# EAGLE board RedBot_Line_Sensor_Panel_v11 (EAGLE 6.5.0)
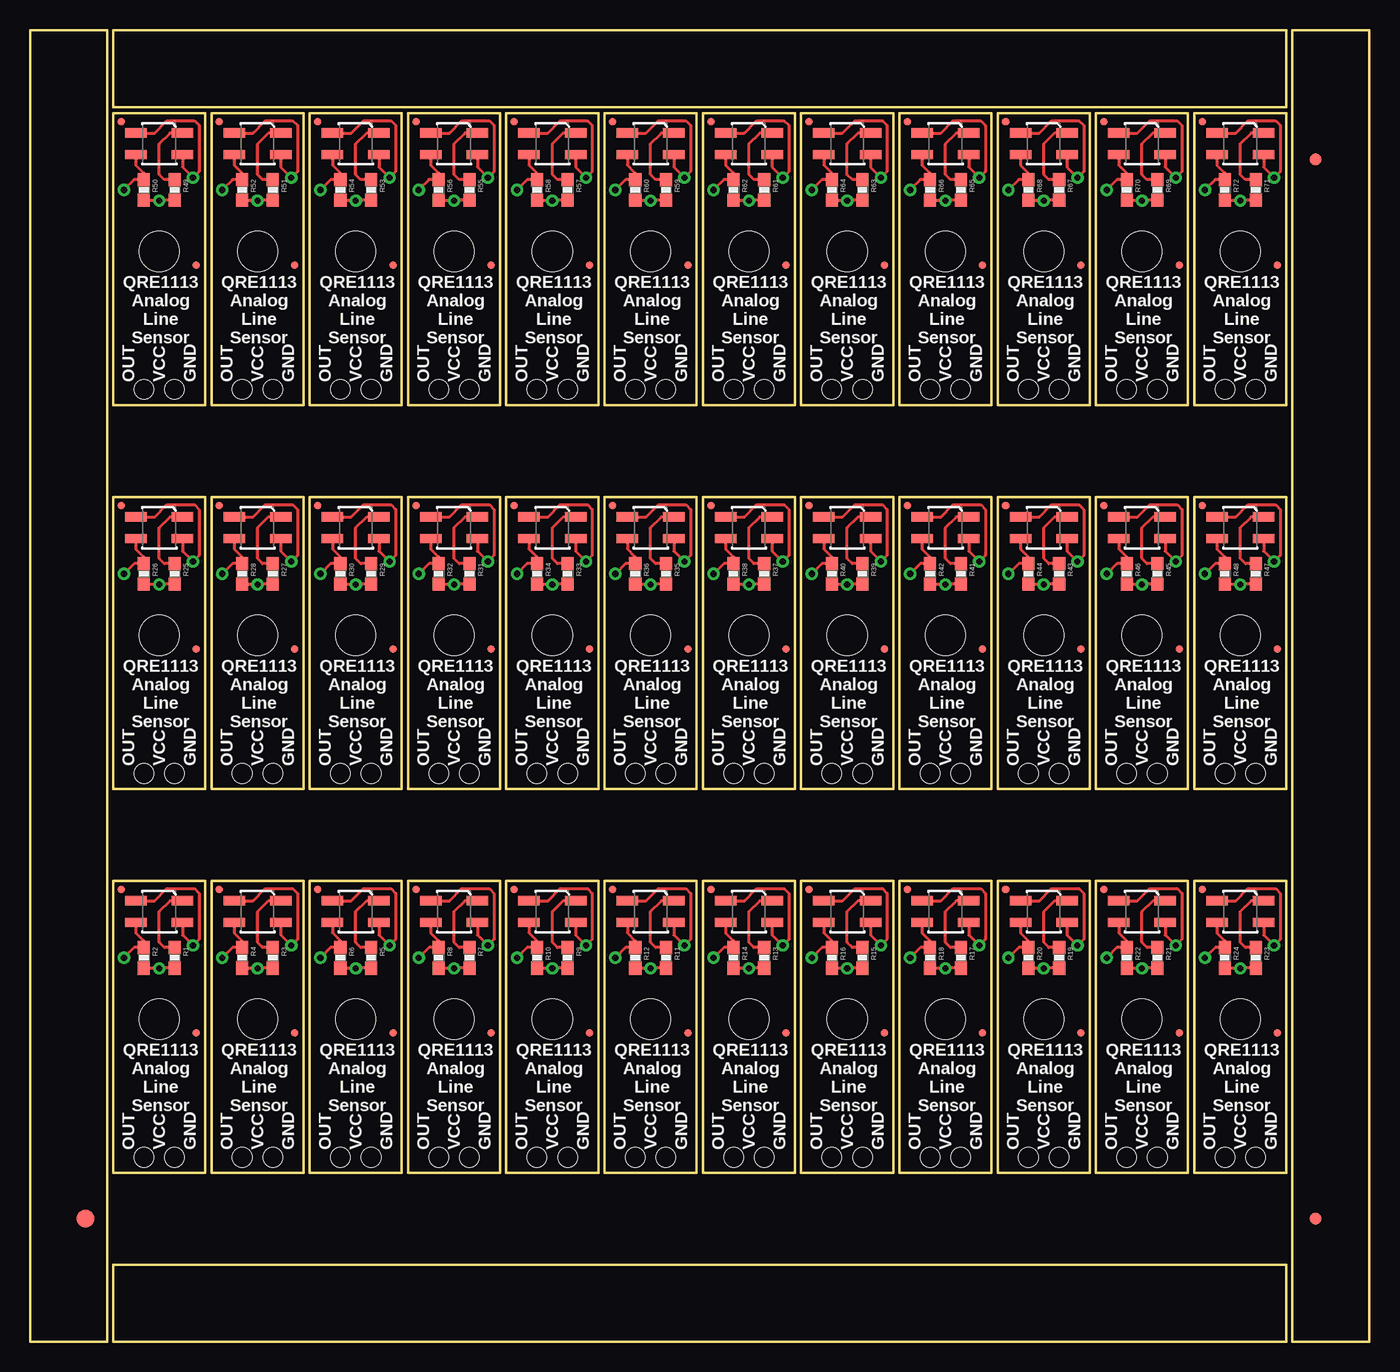
[diagram p0: board, top side]
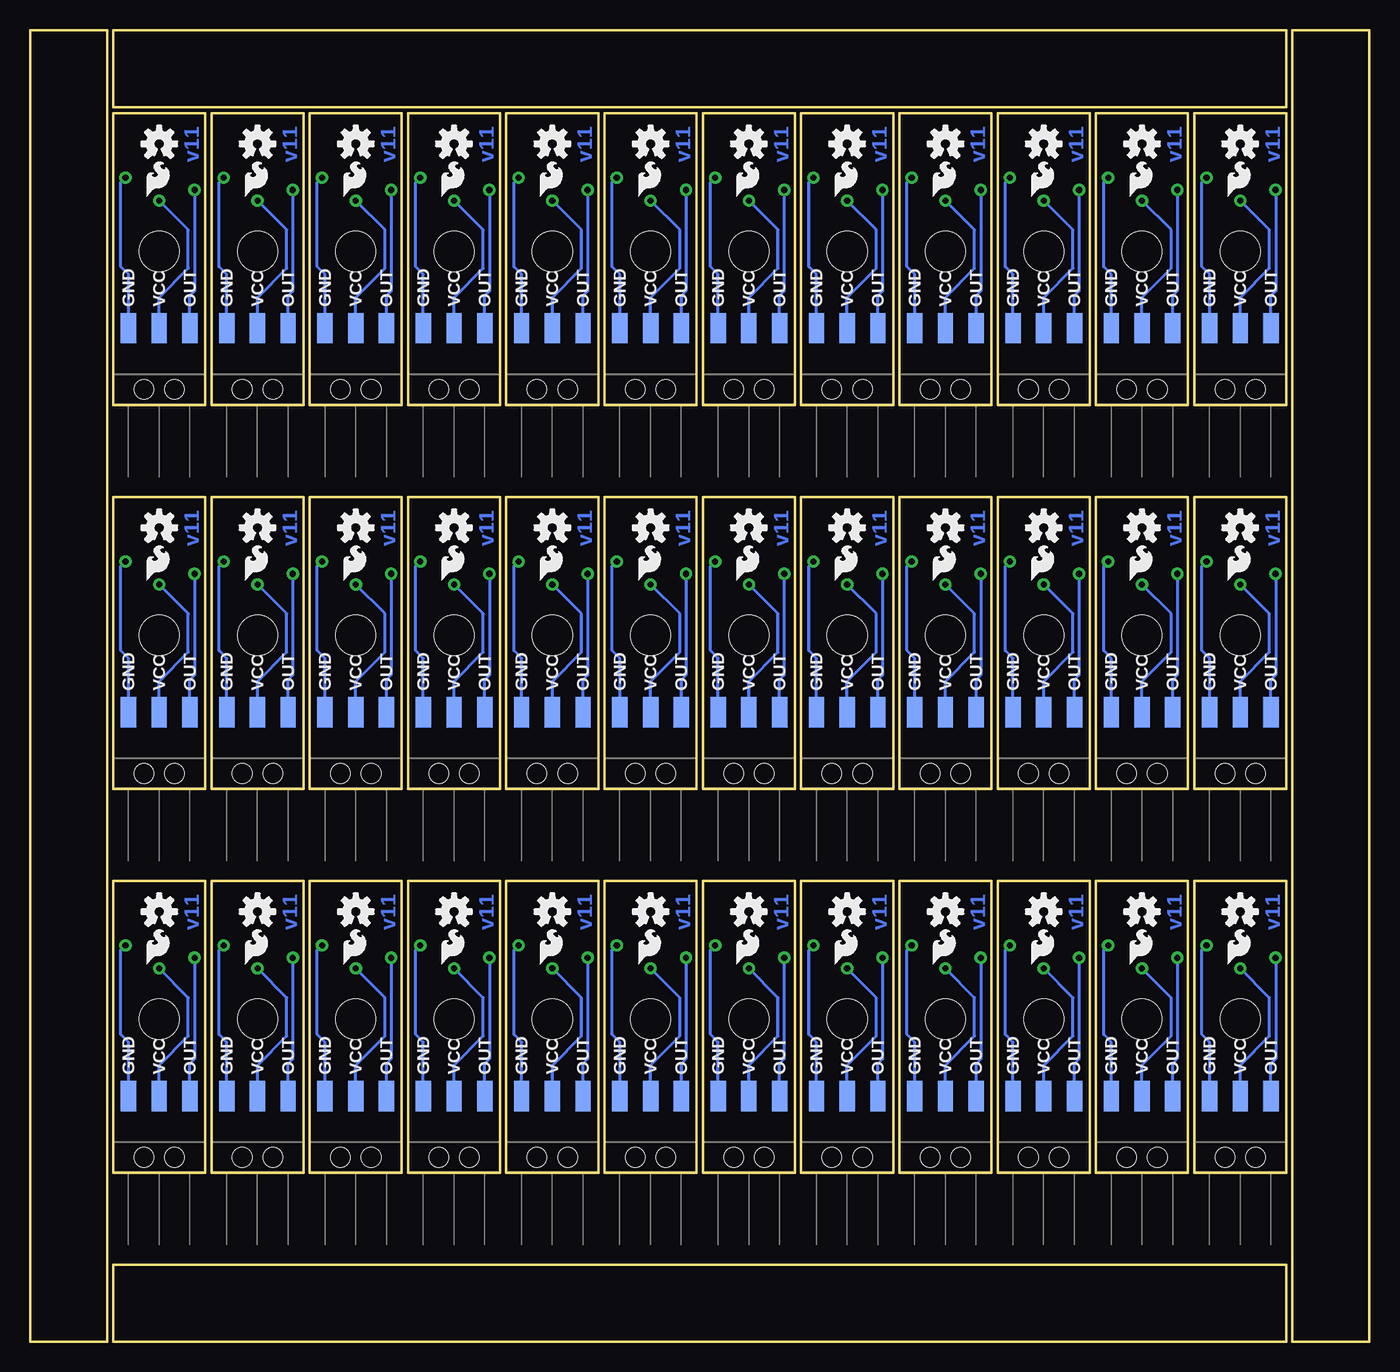
[diagram p1: board, bottom side, seen from below]

Size 110.74 x 108.46 mm. Coordinates in mm from the lower left corner, seen from the top.
Outline: 6.35,86.36 6.35,0 0,0 0,36.83
Outline: 110.74,86.36 110.74,0 104.39,0 104.39,36.83
Outline: 0,29.21 0,108.46 6.35,108.46 6.35,78.74
Outline: 104.39,29.21 104.39,108.46 110.74,108.46 110.74,78.74
Outline: 6.86,13.97 14.48,13.97 14.48,38.1 6.86,38.1 6.86,13.97
Outline: 14.99,13.97 22.61,13.97 22.61,38.1 14.99,38.1 14.99,13.97
Outline: 23.11,13.97 30.73,13.97 30.73,38.1 23.11,38.1 23.11,13.97
Outline: 31.24,13.97 38.86,13.97 38.86,38.1 31.24,38.1 31.24,13.97
Outline: 39.37,13.97 46.99,13.97 46.99,38.1 39.37,38.1 39.37,13.97
Outline: 47.5,13.97 55.12,13.97 55.12,38.1 47.5,38.1 47.5,13.97
Outline: 55.63,13.97 63.25,13.97 63.25,38.1 55.63,38.1 55.63,13.97
Outline: 63.75,13.97 71.37,13.97 71.37,38.1 63.75,38.1 63.75,13.97
Outline: 71.88,13.97 79.5,13.97 79.5,38.1 71.88,38.1 71.88,13.97
Outline: 80.01,13.97 87.63,13.97 87.63,38.1 80.01,38.1 80.01,13.97
Outline: 88.14,13.97 95.76,13.97 95.76,38.1 88.14,38.1 88.14,13.97
Outline: 96.27,13.97 103.89,13.97 103.89,38.1 96.27,38.1 96.27,13.97
Outline: 6.86,45.72 14.48,45.72 14.48,69.85 6.86,69.85 6.86,45.72
Outline: 14.99,45.72 22.61,45.72 22.61,69.85 14.99,69.85 14.99,45.72
Outline: 23.11,45.72 30.73,45.72 30.73,69.85 23.11,69.85 23.11,45.72
Outline: 31.24,45.72 38.86,45.72 38.86,69.85 31.24,69.85 31.24,45.72
Outline: 39.37,45.72 46.99,45.72 46.99,69.85 39.37,69.85 39.37,45.72
Outline: 47.5,45.72 55.12,45.72 55.12,69.85 47.5,69.85 47.5,45.72
Outline: 55.63,45.72 63.25,45.72 63.25,69.85 55.63,69.85 55.63,45.72
Outline: 63.75,45.72 71.37,45.72 71.37,69.85 63.75,69.85 63.75,45.72
Outline: 71.88,45.72 79.5,45.72 79.5,69.85 71.88,69.85 71.88,45.72
Outline: 80.01,45.72 87.63,45.72 87.63,69.85 80.01,69.85 80.01,45.72
Outline: 88.14,45.72 95.76,45.72 95.76,69.85 88.14,69.85 88.14,45.72
Outline: 96.27,45.72 103.89,45.72 103.89,69.85 96.27,69.85 96.27,45.72
Outline: 6.86,77.47 14.48,77.47 14.48,101.6 6.86,101.6 6.86,77.47
Outline: 14.99,77.47 22.61,77.47 22.61,101.6 14.99,101.6 14.99,77.47
Outline: 23.11,77.47 30.73,77.47 30.73,101.6 23.11,101.6 23.11,77.47
Outline: 31.24,77.47 38.86,77.47 38.86,101.6 31.24,101.6 31.24,77.47
Outline: 39.37,77.47 46.99,77.47 46.99,101.6 39.37,101.6 39.37,77.47
Outline: 47.5,77.47 55.12,77.47 55.12,101.6 47.5,101.6 47.5,77.47
Outline: 55.63,77.47 63.25,77.47 63.25,101.6 55.63,101.6 55.63,77.47
Outline: 63.75,77.47 71.37,77.47 71.37,101.6 63.75,101.6 63.75,77.47
Outline: 71.88,77.47 79.5,77.47 79.5,101.6 71.88,101.6 71.88,77.47
Outline: 80.01,77.47 87.63,77.47 87.63,101.6 80.01,101.6 80.01,77.47
Outline: 88.14,77.47 95.76,77.47 95.76,101.6 88.14,101.6 88.14,77.47
Outline: 96.27,77.47 103.89,77.47 103.89,101.6 96.27,101.6 96.27,77.47
Outline: 6.86,102.11 103.89,102.11 103.89,108.46 6.86,108.46 6.86,102.11
Outline: 6.86,0 103.89,0 103.89,6.35 6.86,6.35 6.86,0
Copper layers (1*16): Top 0.035mm / dielectric 1.5mm / Bottom 0.035mm
Design rules "SparkFun-2-layer": minimum track width 7mil, minimum drill 15mil, track to track 8mil, track to pad 8mil, pad to pad 8mil, via to via 8mil, smd to smd 8mil, copper to edge 8mil, drill to drill 8mil, minimum pad ring 12mil, minimum via ring 10mil, stop-mask expansion 4mil, vias tented up to drill 20mil, thermal gap 10mil

## Footprints (pad centres in the part's own frame; a part is rotated, then mirrored left to right if it is on the bottom)
FIDUCIAL-1.5X3 = smd 1.5 x 1.5: 1 0,0
FIDUCIAL-1X2 = smd 1 x 1: 1 0,0
MICRO-FIDUCIAL = smd 0.635 x 0.635: 1 0,0
1X03_SMD_RA_MALE_POST = smd 1.27 x 2.5: 1 -2.54,5.07; 2 0,5.07; 3 2.54,5.07 | hole 1.6: -1.27,0; 1.27,0
0603-RES = smd 1.1 x 1: 1 -0.85,0; 2 0.85,0
STAND-OFF = hole 3.302: 0,0
QRE1113-W = smd 1.778 x 0.762: 1 -1.927,-0.9; 2 1.927,-0.9; 3 1.927,0.9; 4 -1.927,0.9

## Placement (x,y rotation side)
E$1  [FIDUCIAL-1.5X3]  4.57,10.16 0 top
E$2  [FIDUCIAL-1X2]  106.3,10.16 0 top
E$6  [FIDUCIAL-1X2]  106.3,97.79 180 top
FID1  FIDUCIALUFIDUCIAL  [MICRO-FIDUCIAL]  13.74,25.53 0 top
FID2  FIDUCIALUFIDUCIAL  [MICRO-FIDUCIAL]  7.52,37.39 0 top
FID3  FIDUCIALUFIDUCIAL  [MICRO-FIDUCIAL]  21.87,25.53 0 top
FID4  FIDUCIALUFIDUCIAL  [MICRO-FIDUCIAL]  15.65,37.39 0 top
FID5  FIDUCIALUFIDUCIAL  [MICRO-FIDUCIAL]  30,25.53 0 top
FID6  FIDUCIALUFIDUCIAL  [MICRO-FIDUCIAL]  23.77,37.39 0 top
FID7  FIDUCIALUFIDUCIAL  [MICRO-FIDUCIAL]  38.13,25.53 0 top
FID8  FIDUCIALUFIDUCIAL  [MICRO-FIDUCIAL]  31.9,37.39 0 top
FID9  FIDUCIALUFIDUCIAL  [MICRO-FIDUCIAL]  46.25,25.53 0 top
FID10  FIDUCIALUFIDUCIAL  [MICRO-FIDUCIAL]  40.03,37.39 0 top
FID11  FIDUCIALUFIDUCIAL  [MICRO-FIDUCIAL]  54.38,25.53 0 top
FID12  FIDUCIALUFIDUCIAL  [MICRO-FIDUCIAL]  48.16,37.39 0 top
FID13  FIDUCIALUFIDUCIAL  [MICRO-FIDUCIAL]  62.51,25.53 0 top
FID14  FIDUCIALUFIDUCIAL  [MICRO-FIDUCIAL]  56.29,37.39 0 top
FID15  FIDUCIALUFIDUCIAL  [MICRO-FIDUCIAL]  70.64,25.53 0 top
FID16  FIDUCIALUFIDUCIAL  [MICRO-FIDUCIAL]  64.41,37.39 0 top
FID17  FIDUCIALUFIDUCIAL  [MICRO-FIDUCIAL]  78.77,25.53 0 top
FID18  FIDUCIALUFIDUCIAL  [MICRO-FIDUCIAL]  72.54,37.39 0 top
FID19  FIDUCIALUFIDUCIAL  [MICRO-FIDUCIAL]  86.89,25.53 0 top
FID20  FIDUCIALUFIDUCIAL  [MICRO-FIDUCIAL]  80.67,37.39 0 top
FID21  FIDUCIALUFIDUCIAL  [MICRO-FIDUCIAL]  95.02,25.53 0 top
FID22  FIDUCIALUFIDUCIAL  [MICRO-FIDUCIAL]  88.8,37.39 0 top
FID23  FIDUCIALUFIDUCIAL  [MICRO-FIDUCIAL]  103.15,25.53 0 top
FID24  FIDUCIALUFIDUCIAL  [MICRO-FIDUCIAL]  96.93,37.39 0 top
FID25  FIDUCIALUFIDUCIAL  [MICRO-FIDUCIAL]  13.74,57.28 0 top
FID26  FIDUCIALUFIDUCIAL  [MICRO-FIDUCIAL]  7.52,69.14 0 top
FID27  FIDUCIALUFIDUCIAL  [MICRO-FIDUCIAL]  21.87,57.28 0 top
FID28  FIDUCIALUFIDUCIAL  [MICRO-FIDUCIAL]  15.65,69.14 0 top
FID29  FIDUCIALUFIDUCIAL  [MICRO-FIDUCIAL]  30,57.28 0 top
FID30  FIDUCIALUFIDUCIAL  [MICRO-FIDUCIAL]  23.77,69.14 0 top
FID31  FIDUCIALUFIDUCIAL  [MICRO-FIDUCIAL]  38.13,57.28 0 top
FID32  FIDUCIALUFIDUCIAL  [MICRO-FIDUCIAL]  31.9,69.14 0 top
FID33  FIDUCIALUFIDUCIAL  [MICRO-FIDUCIAL]  46.25,57.28 0 top
FID34  FIDUCIALUFIDUCIAL  [MICRO-FIDUCIAL]  40.03,69.14 0 top
FID35  FIDUCIALUFIDUCIAL  [MICRO-FIDUCIAL]  54.38,57.28 0 top
FID36  FIDUCIALUFIDUCIAL  [MICRO-FIDUCIAL]  48.16,69.14 0 top
FID37  FIDUCIALUFIDUCIAL  [MICRO-FIDUCIAL]  62.51,57.28 0 top
FID38  FIDUCIALUFIDUCIAL  [MICRO-FIDUCIAL]  56.29,69.14 0 top
FID39  FIDUCIALUFIDUCIAL  [MICRO-FIDUCIAL]  70.64,57.28 0 top
FID40  FIDUCIALUFIDUCIAL  [MICRO-FIDUCIAL]  64.41,69.14 0 top
FID41  FIDUCIALUFIDUCIAL  [MICRO-FIDUCIAL]  78.77,57.28 0 top
FID42  FIDUCIALUFIDUCIAL  [MICRO-FIDUCIAL]  72.54,69.14 0 top
FID43  FIDUCIALUFIDUCIAL  [MICRO-FIDUCIAL]  86.89,57.28 0 top
FID44  FIDUCIALUFIDUCIAL  [MICRO-FIDUCIAL]  80.67,69.14 0 top
FID45  FIDUCIALUFIDUCIAL  [MICRO-FIDUCIAL]  95.02,57.28 0 top
FID46  FIDUCIALUFIDUCIAL  [MICRO-FIDUCIAL]  88.8,69.14 0 top
FID47  FIDUCIALUFIDUCIAL  [MICRO-FIDUCIAL]  103.15,57.28 0 top
FID48  FIDUCIALUFIDUCIAL  [MICRO-FIDUCIAL]  96.93,69.14 0 top
FID49  FIDUCIALUFIDUCIAL  [MICRO-FIDUCIAL]  13.74,89.03 0 top
FID50  FIDUCIALUFIDUCIAL  [MICRO-FIDUCIAL]  7.52,100.89 0 top
FID51  FIDUCIALUFIDUCIAL  [MICRO-FIDUCIAL]  21.87,89.03 0 top
FID52  FIDUCIALUFIDUCIAL  [MICRO-FIDUCIAL]  15.65,100.89 0 top
FID53  FIDUCIALUFIDUCIAL  [MICRO-FIDUCIAL]  30,89.03 0 top
FID54  FIDUCIALUFIDUCIAL  [MICRO-FIDUCIAL]  23.77,100.89 0 top
FID55  FIDUCIALUFIDUCIAL  [MICRO-FIDUCIAL]  38.13,89.03 0 top
FID56  FIDUCIALUFIDUCIAL  [MICRO-FIDUCIAL]  31.9,100.89 0 top
FID57  FIDUCIALUFIDUCIAL  [MICRO-FIDUCIAL]  46.25,89.03 0 top
FID58  FIDUCIALUFIDUCIAL  [MICRO-FIDUCIAL]  40.03,100.89 0 top
FID59  FIDUCIALUFIDUCIAL  [MICRO-FIDUCIAL]  54.38,89.03 0 top
FID60  FIDUCIALUFIDUCIAL  [MICRO-FIDUCIAL]  48.16,100.89 0 top
FID61  FIDUCIALUFIDUCIAL  [MICRO-FIDUCIAL]  62.51,89.03 0 top
FID62  FIDUCIALUFIDUCIAL  [MICRO-FIDUCIAL]  56.29,100.89 0 top
FID63  FIDUCIALUFIDUCIAL  [MICRO-FIDUCIAL]  70.64,89.03 0 top
FID64  FIDUCIALUFIDUCIAL  [MICRO-FIDUCIAL]  64.41,100.89 0 top
FID65  FIDUCIALUFIDUCIAL  [MICRO-FIDUCIAL]  78.77,89.03 0 top
FID66  FIDUCIALUFIDUCIAL  [MICRO-FIDUCIAL]  72.54,100.89 0 top
FID67  FIDUCIALUFIDUCIAL  [MICRO-FIDUCIAL]  86.89,89.03 0 top
FID68  FIDUCIALUFIDUCIAL  [MICRO-FIDUCIAL]  80.67,100.89 0 top
FID69  FIDUCIALUFIDUCIAL  [MICRO-FIDUCIAL]  95.02,89.03 0 top
FID70  FIDUCIALUFIDUCIAL  [MICRO-FIDUCIAL]  88.8,100.89 0 top
FID71  FIDUCIALUFIDUCIAL  [MICRO-FIDUCIAL]  103.15,89.03 0 top
FID72  FIDUCIALUFIDUCIAL  [MICRO-FIDUCIAL]  96.93,100.89 0 top
JP1  [1X03_SMD_RA_MALE_POST]  10.67,15.24 0 bottom
JP2  [1X03_SMD_RA_MALE_POST]  18.8,15.24 0 bottom
JP3  [1X03_SMD_RA_MALE_POST]  26.92,15.24 0 bottom
JP4  [1X03_SMD_RA_MALE_POST]  35.05,15.24 0 bottom
JP5  [1X03_SMD_RA_MALE_POST]  43.18,15.24 0 bottom
JP6  [1X03_SMD_RA_MALE_POST]  51.31,15.24 0 bottom
JP7  [1X03_SMD_RA_MALE_POST]  59.44,15.24 0 bottom
JP8  [1X03_SMD_RA_MALE_POST]  67.56,15.24 0 bottom
JP9  [1X03_SMD_RA_MALE_POST]  75.69,15.24 0 bottom
JP10  [1X03_SMD_RA_MALE_POST]  83.82,15.24 0 bottom
JP11  [1X03_SMD_RA_MALE_POST]  91.95,15.24 0 bottom
JP12  [1X03_SMD_RA_MALE_POST]  100.08,15.24 0 bottom
JP13  [1X03_SMD_RA_MALE_POST]  10.67,46.99 0 bottom
JP14  [1X03_SMD_RA_MALE_POST]  18.8,46.99 0 bottom
JP15  [1X03_SMD_RA_MALE_POST]  26.92,46.99 0 bottom
JP16  [1X03_SMD_RA_MALE_POST]  35.05,46.99 0 bottom
JP17  [1X03_SMD_RA_MALE_POST]  43.18,46.99 0 bottom
JP18  [1X03_SMD_RA_MALE_POST]  51.31,46.99 0 bottom
JP19  [1X03_SMD_RA_MALE_POST]  59.44,46.99 0 bottom
JP20  [1X03_SMD_RA_MALE_POST]  67.56,46.99 0 bottom
JP21  [1X03_SMD_RA_MALE_POST]  75.69,46.99 0 bottom
JP22  [1X03_SMD_RA_MALE_POST]  83.82,46.99 0 bottom
JP23  [1X03_SMD_RA_MALE_POST]  91.95,46.99 0 bottom
JP24  [1X03_SMD_RA_MALE_POST]  100.08,46.99 0 bottom
JP25  [1X03_SMD_RA_MALE_POST]  10.67,78.74 0 bottom
JP26  [1X03_SMD_RA_MALE_POST]  18.8,78.74 0 bottom
JP27  [1X03_SMD_RA_MALE_POST]  26.92,78.74 0 bottom
JP28  [1X03_SMD_RA_MALE_POST]  35.05,78.74 0 bottom
JP29  [1X03_SMD_RA_MALE_POST]  43.18,78.74 0 bottom
JP30  [1X03_SMD_RA_MALE_POST]  51.31,78.74 0 bottom
JP31  [1X03_SMD_RA_MALE_POST]  59.44,78.74 0 bottom
JP32  [1X03_SMD_RA_MALE_POST]  67.56,78.74 0 bottom
JP33  [1X03_SMD_RA_MALE_POST]  75.69,78.74 0 bottom
JP34  [1X03_SMD_RA_MALE_POST]  83.82,78.74 0 bottom
JP35  [1X03_SMD_RA_MALE_POST]  91.95,78.74 0 bottom
JP36  [1X03_SMD_RA_MALE_POST]  100.08,78.74 0 bottom
LOGO1  OSHW-LOGOS  [OSHW-LOGO-S]  18.8,35.56 0 bottom
LOGO2  OSHW-LOGOS  [OSHW-LOGO-S]  10.67,35.56 0 bottom
LOGO3  LOGO-SFESK  [SFE-LOGO-FLAME]  11.68,31.24 0 bottom
LOGO4  LOGO-SFESK  [SFE-LOGO-FLAME]  19.81,31.24 0 bottom
LOGO5  OSHW-LOGOS  [OSHW-LOGO-S]  26.92,35.56 0 bottom
LOGO6  LOGO-SFESK  [SFE-LOGO-FLAME]  27.94,31.24 0 bottom
LOGO7  OSHW-LOGOS  [OSHW-LOGO-S]  35.05,35.56 0 bottom
LOGO8  LOGO-SFESK  [SFE-LOGO-FLAME]  36.07,31.24 0 bottom
LOGO9  OSHW-LOGOS  [OSHW-LOGO-S]  43.18,35.56 0 bottom
LOGO10  LOGO-SFESK  [SFE-LOGO-FLAME]  44.2,31.24 0 bottom
LOGO11  OSHW-LOGOS  [OSHW-LOGO-S]  51.31,35.56 0 bottom
LOGO12  LOGO-SFESK  [SFE-LOGO-FLAME]  52.32,31.24 0 bottom
LOGO13  OSHW-LOGOS  [OSHW-LOGO-S]  59.44,35.56 0 bottom
LOGO14  LOGO-SFESK  [SFE-LOGO-FLAME]  60.45,31.24 0 bottom
LOGO15  OSHW-LOGOS  [OSHW-LOGO-S]  67.56,35.56 0 bottom
LOGO16  LOGO-SFESK  [SFE-LOGO-FLAME]  68.58,31.24 0 bottom
LOGO17  OSHW-LOGOS  [OSHW-LOGO-S]  75.69,35.56 0 bottom
LOGO18  LOGO-SFESK  [SFE-LOGO-FLAME]  76.71,31.24 0 bottom
LOGO19  OSHW-LOGOS  [OSHW-LOGO-S]  83.82,35.56 0 bottom
LOGO20  LOGO-SFESK  [SFE-LOGO-FLAME]  84.84,31.24 0 bottom
LOGO21  OSHW-LOGOS  [OSHW-LOGO-S]  91.95,35.56 0 bottom
LOGO22  LOGO-SFESK  [SFE-LOGO-FLAME]  92.96,31.24 0 bottom
LOGO23  OSHW-LOGOS  [OSHW-LOGO-S]  100.08,35.56 0 bottom
LOGO24  LOGO-SFESK  [SFE-LOGO-FLAME]  101.09,31.24 0 bottom
LOGO25  OSHW-LOGOS  [OSHW-LOGO-S]  10.67,67.31 0 bottom
LOGO26  LOGO-SFESK  [SFE-LOGO-FLAME]  11.68,62.99 0 bottom
LOGO27  OSHW-LOGOS  [OSHW-LOGO-S]  18.8,67.31 0 bottom
LOGO28  LOGO-SFESK  [SFE-LOGO-FLAME]  19.81,62.99 0 bottom
LOGO29  OSHW-LOGOS  [OSHW-LOGO-S]  26.92,67.31 0 bottom
LOGO30  LOGO-SFESK  [SFE-LOGO-FLAME]  27.94,62.99 0 bottom
LOGO31  OSHW-LOGOS  [OSHW-LOGO-S]  35.05,67.31 0 bottom
LOGO32  LOGO-SFESK  [SFE-LOGO-FLAME]  36.07,62.99 0 bottom
LOGO33  OSHW-LOGOS  [OSHW-LOGO-S]  43.18,67.31 0 bottom
LOGO34  LOGO-SFESK  [SFE-LOGO-FLAME]  44.2,62.99 0 bottom
LOGO35  OSHW-LOGOS  [OSHW-LOGO-S]  51.31,67.31 0 bottom
LOGO36  LOGO-SFESK  [SFE-LOGO-FLAME]  52.32,62.99 0 bottom
LOGO37  OSHW-LOGOS  [OSHW-LOGO-S]  59.44,67.31 0 bottom
LOGO38  LOGO-SFESK  [SFE-LOGO-FLAME]  60.45,62.99 0 bottom
LOGO39  OSHW-LOGOS  [OSHW-LOGO-S]  67.56,67.31 0 bottom
LOGO40  LOGO-SFESK  [SFE-LOGO-FLAME]  68.58,62.99 0 bottom
LOGO41  OSHW-LOGOS  [OSHW-LOGO-S]  75.69,67.31 0 bottom
LOGO42  LOGO-SFESK  [SFE-LOGO-FLAME]  76.71,62.99 0 bottom
LOGO43  OSHW-LOGOS  [OSHW-LOGO-S]  83.82,67.31 0 bottom
LOGO44  LOGO-SFESK  [SFE-LOGO-FLAME]  84.84,62.99 0 bottom
LOGO45  OSHW-LOGOS  [OSHW-LOGO-S]  91.95,67.31 0 bottom
LOGO46  LOGO-SFESK  [SFE-LOGO-FLAME]  92.96,62.99 0 bottom
LOGO47  OSHW-LOGOS  [OSHW-LOGO-S]  100.08,67.31 0 bottom
LOGO48  LOGO-SFESK  [SFE-LOGO-FLAME]  101.09,62.99 0 bottom
LOGO49  OSHW-LOGOS  [OSHW-LOGO-S]  10.67,99.06 0 bottom
LOGO50  LOGO-SFESK  [SFE-LOGO-FLAME]  11.68,94.74 0 bottom
LOGO51  OSHW-LOGOS  [OSHW-LOGO-S]  18.8,99.06 0 bottom
LOGO52  LOGO-SFESK  [SFE-LOGO-FLAME]  19.81,94.74 0 bottom
LOGO53  OSHW-LOGOS  [OSHW-LOGO-S]  26.92,99.06 0 bottom
LOGO54  LOGO-SFESK  [SFE-LOGO-FLAME]  27.94,94.74 0 bottom
LOGO55  OSHW-LOGOS  [OSHW-LOGO-S]  35.05,99.06 0 bottom
LOGO56  LOGO-SFESK  [SFE-LOGO-FLAME]  36.07,94.74 0 bottom
LOGO57  OSHW-LOGOS  [OSHW-LOGO-S]  43.18,99.06 0 bottom
LOGO58  LOGO-SFESK  [SFE-LOGO-FLAME]  44.2,94.74 0 bottom
LOGO59  OSHW-LOGOS  [OSHW-LOGO-S]  51.31,99.06 0 bottom
LOGO60  LOGO-SFESK  [SFE-LOGO-FLAME]  52.32,94.74 0 bottom
LOGO61  OSHW-LOGOS  [OSHW-LOGO-S]  59.44,99.06 0 bottom
LOGO62  LOGO-SFESK  [SFE-LOGO-FLAME]  60.45,94.74 0 bottom
LOGO63  OSHW-LOGOS  [OSHW-LOGO-S]  67.56,99.06 0 bottom
LOGO64  LOGO-SFESK  [SFE-LOGO-FLAME]  68.58,94.74 0 bottom
LOGO65  OSHW-LOGOS  [OSHW-LOGO-S]  75.69,99.06 0 bottom
LOGO66  LOGO-SFESK  [SFE-LOGO-FLAME]  76.71,94.74 0 bottom
LOGO67  OSHW-LOGOS  [OSHW-LOGO-S]  83.82,99.06 0 bottom
LOGO68  LOGO-SFESK  [SFE-LOGO-FLAME]  84.84,94.74 0 bottom
LOGO69  OSHW-LOGOS  [OSHW-LOGO-S]  91.95,99.06 0 bottom
LOGO70  LOGO-SFESK  [SFE-LOGO-FLAME]  92.96,94.74 0 bottom
LOGO71  OSHW-LOGOS  [OSHW-LOGO-S]  100.08,99.06 0 bottom
LOGO72  LOGO-SFESK  [SFE-LOGO-FLAME]  101.09,94.74 0 bottom
R1  100  [0603-RES]  11.94,31.75 270 top
R2  10k  [0603-RES]  9.4,31.75 270 top
R3  100  [0603-RES]  20.07,31.75 270 top
R4  10k  [0603-RES]  17.53,31.75 270 top
R5  100  [0603-RES]  28.19,31.75 270 top
R6  10k  [0603-RES]  25.65,31.75 270 top
R7  100  [0603-RES]  36.32,31.75 270 top
R8  10k  [0603-RES]  33.78,31.75 270 top
R9  100  [0603-RES]  44.45,31.75 270 top
R10  10k  [0603-RES]  41.91,31.75 270 top
R11  100  [0603-RES]  52.58,31.75 270 top
R12  10k  [0603-RES]  50.04,31.75 270 top
R13  100  [0603-RES]  60.71,31.75 270 top
R14  10k  [0603-RES]  58.17,31.75 270 top
R15  100  [0603-RES]  68.83,31.75 270 top
R16  10k  [0603-RES]  66.29,31.75 270 top
R17  100  [0603-RES]  76.96,31.75 270 top
R18  10k  [0603-RES]  74.42,31.75 270 top
R19  100  [0603-RES]  85.09,31.75 270 top
R20  10k  [0603-RES]  82.55,31.75 270 top
R21  100  [0603-RES]  93.22,31.75 270 top
R22  10k  [0603-RES]  90.68,31.75 270 top
R23  100  [0603-RES]  101.35,31.75 270 top
R24  10k  [0603-RES]  98.81,31.75 270 top
R25  100  [0603-RES]  11.94,63.5 270 top
R26  10k  [0603-RES]  9.4,63.5 270 top
R27  100  [0603-RES]  20.07,63.5 270 top
R28  10k  [0603-RES]  17.53,63.5 270 top
R29  100  [0603-RES]  28.19,63.5 270 top
R30  10k  [0603-RES]  25.65,63.5 270 top
R31  100  [0603-RES]  36.32,63.5 270 top
R32  10k  [0603-RES]  33.78,63.5 270 top
R33  100  [0603-RES]  44.45,63.5 270 top
R34  10k  [0603-RES]  41.91,63.5 270 top
R35  100  [0603-RES]  52.58,63.5 270 top
R36  10k  [0603-RES]  50.04,63.5 270 top
R37  100  [0603-RES]  60.71,63.5 270 top
R38  10k  [0603-RES]  58.17,63.5 270 top
R39  100  [0603-RES]  68.83,63.5 270 top
R40  10k  [0603-RES]  66.29,63.5 270 top
R41  100  [0603-RES]  76.96,63.5 270 top
R42  10k  [0603-RES]  74.42,63.5 270 top
R43  100  [0603-RES]  85.09,63.5 270 top
R44  10k  [0603-RES]  82.55,63.5 270 top
R45  100  [0603-RES]  93.22,63.5 270 top
R46  10k  [0603-RES]  90.68,63.5 270 top
R47  100  [0603-RES]  101.35,63.5 270 top
R48  10k  [0603-RES]  98.81,63.5 270 top
R49  100  [0603-RES]  11.94,95.25 270 top
R50  10k  [0603-RES]  9.4,95.25 270 top
R51  100  [0603-RES]  20.07,95.25 270 top
R52  10k  [0603-RES]  17.53,95.25 270 top
R53  100  [0603-RES]  28.19,95.25 270 top
R54  10k  [0603-RES]  25.65,95.25 270 top
R55  100  [0603-RES]  36.32,95.25 270 top
R56  10k  [0603-RES]  33.78,95.25 270 top
R57  100  [0603-RES]  44.45,95.25 270 top
R58  10k  [0603-RES]  41.91,95.25 270 top
R59  100  [0603-RES]  52.58,95.25 270 top
R60  10k  [0603-RES]  50.04,95.25 270 top
R61  100  [0603-RES]  60.71,95.25 270 top
R62  10k  [0603-RES]  58.17,95.25 270 top
R63  100  [0603-RES]  68.83,95.25 270 top
R64  10k  [0603-RES]  66.29,95.25 270 top
R65  100  [0603-RES]  76.96,95.25 270 top
R66  10k  [0603-RES]  74.42,95.25 270 top
R67  100  [0603-RES]  85.09,95.25 270 top
R68  10k  [0603-RES]  82.55,95.25 270 top
R69  100  [0603-RES]  93.22,95.25 270 top
R70  10k  [0603-RES]  90.68,95.25 270 top
R71  100  [0603-RES]  101.35,95.25 270 top
R72  10k  [0603-RES]  98.81,95.25 270 top
STANDOFF1  STAND-OFF  [STAND-OFF]  10.67,26.67 0 top
STANDOFF2  STAND-OFF  [STAND-OFF]  18.8,26.67 0 top
STANDOFF3  STAND-OFF  [STAND-OFF]  26.92,26.67 0 top
STANDOFF4  STAND-OFF  [STAND-OFF]  35.05,26.67 0 top
STANDOFF5  STAND-OFF  [STAND-OFF]  43.18,26.67 0 top
STANDOFF6  STAND-OFF  [STAND-OFF]  51.31,26.67 0 top
STANDOFF7  STAND-OFF  [STAND-OFF]  59.44,26.67 0 top
STANDOFF8  STAND-OFF  [STAND-OFF]  67.56,26.67 0 top
STANDOFF9  STAND-OFF  [STAND-OFF]  75.69,26.67 0 top
STANDOFF10  STAND-OFF  [STAND-OFF]  83.82,26.67 0 top
STANDOFF11  STAND-OFF  [STAND-OFF]  91.95,26.67 0 top
STANDOFF12  STAND-OFF  [STAND-OFF]  100.08,26.67 0 top
STANDOFF13  STAND-OFF  [STAND-OFF]  10.67,58.42 0 top
STANDOFF14  STAND-OFF  [STAND-OFF]  18.8,58.42 0 top
STANDOFF15  STAND-OFF  [STAND-OFF]  26.92,58.42 0 top
STANDOFF16  STAND-OFF  [STAND-OFF]  35.05,58.42 0 top
STANDOFF17  STAND-OFF  [STAND-OFF]  43.18,58.42 0 top
STANDOFF18  STAND-OFF  [STAND-OFF]  51.31,58.42 0 top
STANDOFF19  STAND-OFF  [STAND-OFF]  59.44,58.42 0 top
STANDOFF20  STAND-OFF  [STAND-OFF]  67.56,58.42 0 top
STANDOFF21  STAND-OFF  [STAND-OFF]  75.69,58.42 0 top
STANDOFF22  STAND-OFF  [STAND-OFF]  83.82,58.42 0 top
STANDOFF23  STAND-OFF  [STAND-OFF]  91.95,58.42 0 top
STANDOFF24  STAND-OFF  [STAND-OFF]  100.08,58.42 0 top
STANDOFF25  STAND-OFF  [STAND-OFF]  10.67,90.17 0 top
STANDOFF26  STAND-OFF  [STAND-OFF]  18.8,90.17 0 top
STANDOFF27  STAND-OFF  [STAND-OFF]  26.92,90.17 0 top
STANDOFF28  STAND-OFF  [STAND-OFF]  35.05,90.17 0 top
STANDOFF29  STAND-OFF  [STAND-OFF]  43.18,90.17 0 top
STANDOFF30  STAND-OFF  [STAND-OFF]  51.31,90.17 0 top
STANDOFF31  STAND-OFF  [STAND-OFF]  59.44,90.17 0 top
STANDOFF32  STAND-OFF  [STAND-OFF]  67.56,90.17 0 top
STANDOFF33  STAND-OFF  [STAND-OFF]  75.69,90.17 0 top
STANDOFF34  STAND-OFF  [STAND-OFF]  83.82,90.17 0 top
STANDOFF35  STAND-OFF  [STAND-OFF]  91.95,90.17 0 top
STANDOFF36  STAND-OFF  [STAND-OFF]  100.08,90.17 0 top
U1  QRE1113SMD-W  [QRE1113-W]  10.67,35.56 180 top
U2  QRE1113SMD-W  [QRE1113-W]  18.8,35.56 180 top
U3  QRE1113SMD-W  [QRE1113-W]  26.92,35.56 180 top
U4  QRE1113SMD-W  [QRE1113-W]  35.05,35.56 180 top
U5  QRE1113SMD-W  [QRE1113-W]  43.18,35.56 180 top
U6  QRE1113SMD-W  [QRE1113-W]  51.31,35.56 180 top
U7  QRE1113SMD-W  [QRE1113-W]  59.44,35.56 180 top
U8  QRE1113SMD-W  [QRE1113-W]  67.56,35.56 180 top
U9  QRE1113SMD-W  [QRE1113-W]  75.69,35.56 180 top
U10  QRE1113SMD-W  [QRE1113-W]  83.82,35.56 180 top
U11  QRE1113SMD-W  [QRE1113-W]  91.95,35.56 180 top
U12  QRE1113SMD-W  [QRE1113-W]  100.08,35.56 180 top
U13  QRE1113SMD-W  [QRE1113-W]  10.67,67.31 180 top
U14  QRE1113SMD-W  [QRE1113-W]  18.8,67.31 180 top
U15  QRE1113SMD-W  [QRE1113-W]  26.92,67.31 180 top
U16  QRE1113SMD-W  [QRE1113-W]  35.05,67.31 180 top
U17  QRE1113SMD-W  [QRE1113-W]  43.18,67.31 180 top
U18  QRE1113SMD-W  [QRE1113-W]  51.31,67.31 180 top
U19  QRE1113SMD-W  [QRE1113-W]  59.44,67.31 180 top
U20  QRE1113SMD-W  [QRE1113-W]  67.56,67.31 180 top
U21  QRE1113SMD-W  [QRE1113-W]  75.69,67.31 180 top
U22  QRE1113SMD-W  [QRE1113-W]  83.82,67.31 180 top
U23  QRE1113SMD-W  [QRE1113-W]  91.95,67.31 180 top
U24  QRE1113SMD-W  [QRE1113-W]  100.08,67.31 180 top
U25  QRE1113SMD-W  [QRE1113-W]  10.67,99.06 180 top
U26  QRE1113SMD-W  [QRE1113-W]  18.8,99.06 180 top
U27  QRE1113SMD-W  [QRE1113-W]  26.92,99.06 180 top
U28  QRE1113SMD-W  [QRE1113-W]  35.05,99.06 180 top
U29  QRE1113SMD-W  [QRE1113-W]  43.18,99.06 180 top
U30  QRE1113SMD-W  [QRE1113-W]  51.31,99.06 180 top
U31  QRE1113SMD-W  [QRE1113-W]  59.44,99.06 180 top
U32  QRE1113SMD-W  [QRE1113-W]  67.56,99.06 180 top
U33  QRE1113SMD-W  [QRE1113-W]  75.69,99.06 180 top
U34  QRE1113SMD-W  [QRE1113-W]  83.82,99.06 180 top
U35  QRE1113SMD-W  [QRE1113-W]  91.95,99.06 180 top
U36  QRE1113SMD-W  [QRE1113-W]  100.08,99.06 180 top

## Library data of the parts
E$1 E$2 E$6 FID1-FID72 LOGO1-LOGO72 = SparkFun-Aesthetics
JP1-JP36 = SparkFun-Connectors
R1 R3 R5 R7 R9 R11 R13 R15 R17 R19 R21 R23 R25 R27 R29 R31 R33 R35 R37 R39 R41 R43 R45 R47 R49 R51 R53 R55 R57 R59 R61 R63 R65 R67 R69 R71 = SparkFun-Resistors; PROD_ID: RES-07863
R2 R4 R6 R8 R10 R12 R14 R16 R18 R20 R22 R24 R26 R28 R30 R32 R34 R36 R38 R40 R42 R44 R46 R48 R50 R52 R54 R56 R58 R60 R62 R64 R66 R68 R70 R72 = SparkFun-Resistors; PROD_ID: RES-00824
STANDOFF1-STANDOFF36 = SparkFun-Electromechanical
U1-U36 = SparkFun-Sensors

## Nets
5V: JP1.2 R1.2 R2.2
5V1: JP2.2 R3.2 R4.2
5V2: JP3.2 R5.2 R6.2
5V3: JP4.2 R7.2 R8.2
5V4: JP5.2 R9.2 R10.2
5V5: JP6.2 R11.2 R12.2
5V6: JP7.2 R13.2 R14.2
5V7: JP8.2 R15.2 R16.2
5V8: JP9.2 R17.2 R18.2
5V9: JP10.2 R19.2 R20.2
5V10: JP11.2 R21.2 R22.2
5V11: JP12.2 R23.2 R24.2
5V12: JP13.2 R25.2 R26.2
5V13: JP14.2 R27.2 R28.2
5V14: JP15.2 R29.2 R30.2
5V15: JP16.2 R31.2 R32.2
5V16: JP17.2 R33.2 R34.2
5V17: JP18.2 R35.2 R36.2
5V18: JP19.2 R37.2 R38.2
5V19: JP20.2 R39.2 R40.2
5V20: JP21.2 R41.2 R42.2
5V21: JP22.2 R43.2 R44.2
5V22: JP23.2 R45.2 R46.2
5V23: JP24.2 R47.2 R48.2
5V24: JP25.2 R49.2 R50.2
5V25: JP26.2 R51.2 R52.2
5V26: JP27.2 R53.2 R54.2
5V27: JP28.2 R55.2 R56.2
5V28: JP29.2 R57.2 R58.2
5V29: JP30.2 R59.2 R60.2
5V30: JP31.2 R61.2 R62.2
5V31: JP32.2 R63.2 R64.2
5V32: JP33.2 R65.2 R66.2
5V33: JP34.2 R67.2 R68.2
5V34: JP35.2 R69.2 R70.2
5V35: JP36.2 R71.2 R72.2
GND: JP1.1 U1.2 U1.4
GND1: JP2.1 U2.2 U2.4
GND2: JP3.1 U3.2 U3.4
GND3: JP4.1 U4.2 U4.4
GND4: JP5.1 U5.2 U5.4
GND5: JP6.1 U6.2 U6.4
GND6: JP7.1 U7.2 U7.4
GND7: JP8.1 U8.2 U8.4
GND8: JP9.1 U9.2 U9.4
GND9: JP10.1 U10.2 U10.4
GND10: JP11.1 U11.2 U11.4
GND11: JP12.1 U12.2 U12.4
GND12: JP13.1 U13.2 U13.4
GND13: JP14.1 U14.2 U14.4
GND14: JP15.1 U15.2 U15.4
GND15: JP16.1 U16.2 U16.4
GND16: JP17.1 U17.2 U17.4
GND17: JP18.1 U18.2 U18.4
GND18: JP19.1 U19.2 U19.4
GND19: JP20.1 U20.2 U20.4
GND20: JP21.1 U21.2 U21.4
GND21: JP22.1 U22.2 U22.4
GND22: JP23.1 U23.2 U23.4
GND23: JP24.1 U24.2 U24.4
GND24: JP25.1 U25.2 U25.4
GND25: JP26.1 U26.2 U26.4
GND26: JP27.1 U27.2 U27.4
GND27: JP28.1 U28.2 U28.4
GND28: JP29.1 U29.2 U29.4
GND29: JP30.1 U30.2 U30.4
GND30: JP31.1 U31.2 U31.4
GND31: JP32.1 U32.2 U32.4
GND32: JP33.1 U33.2 U33.4
GND33: JP34.1 U34.2 U34.4
GND34: JP35.1 U35.2 U35.4
GND35: JP36.1 U36.2 U36.4
N$1: R1.1 U1.1
N$2: JP1.3 R2.1 U1.3
N$3: R3.1 U2.1
N$4: JP2.3 R4.1 U2.3
N$5: R5.1 U3.1
N$6: JP3.3 R6.1 U3.3
N$7: R7.1 U4.1
N$8: JP4.3 R8.1 U4.3
N$9: R9.1 U5.1
N$10: JP5.3 R10.1 U5.3
N$11: R11.1 U6.1
N$12: JP6.3 R12.1 U6.3
N$13: R13.1 U7.1
N$14: JP7.3 R14.1 U7.3
N$15: R15.1 U8.1
N$16: JP8.3 R16.1 U8.3
N$17: R17.1 U9.1
N$18: JP9.3 R18.1 U9.3
N$19: R19.1 U10.1
N$20: JP10.3 R20.1 U10.3
N$21: R21.1 U11.1
N$22: JP11.3 R22.1 U11.3
N$23: R23.1 U12.1
N$24: JP12.3 R24.1 U12.3
N$25: R25.1 U13.1
N$26: JP13.3 R26.1 U13.3
N$27: R27.1 U14.1
N$28: JP14.3 R28.1 U14.3
N$29: R29.1 U15.1
N$30: JP15.3 R30.1 U15.3
N$31: R31.1 U16.1
N$32: JP16.3 R32.1 U16.3
N$33: R33.1 U17.1
N$34: JP17.3 R34.1 U17.3
N$35: R35.1 U18.1
N$36: JP18.3 R36.1 U18.3
N$37: R37.1 U19.1
N$38: JP19.3 R38.1 U19.3
N$39: R39.1 U20.1
N$40: JP20.3 R40.1 U20.3
N$41: R41.1 U21.1
N$42: JP21.3 R42.1 U21.3
N$43: R43.1 U22.1
N$44: JP22.3 R44.1 U22.3
N$45: R45.1 U23.1
N$46: JP23.3 R46.1 U23.3
N$47: R47.1 U24.1
N$48: JP24.3 R48.1 U24.3
N$49: R49.1 U25.1
N$50: JP25.3 R50.1 U25.3
N$51: R51.1 U26.1
N$52: JP26.3 R52.1 U26.3
N$53: R53.1 U27.1
N$54: JP27.3 R54.1 U27.3
N$55: R55.1 U28.1
N$56: JP28.3 R56.1 U28.3
N$57: R57.1 U29.1
N$58: JP29.3 R58.1 U29.3
N$59: R59.1 U30.1
N$60: JP30.3 R60.1 U30.3
N$61: R61.1 U31.1
N$62: JP31.3 R62.1 U31.3
N$63: R63.1 U32.1
N$64: JP32.3 R64.1 U32.3
N$65: R65.1 U33.1
N$66: JP33.3 R66.1 U33.3
N$67: R67.1 U34.1
N$68: JP34.3 R68.1 U34.3
N$69: R69.1 U35.1
N$70: JP35.3 R70.1 U35.3
N$71: R71.1 U36.1
N$72: JP36.3 R72.1 U36.3

## Tracks (layer width: path | path; a pad name or v marks a point on that pad's centre or on a via)
5V  (via drill 0.51)
  Top 0.254: R2.2 10.63,30.9 v10.67,30.86 10.71,30.9 R1.2
  Bottom 0.254: JP1.2 10.67,22.86 8.26,25.27 8.26,28.45 v10.67,30.86
5V1  (via drill 0.51)
  Top 0.254: R4.2 18.76,30.9 v18.8,30.86 18.84,30.9 R3.2
  Bottom 0.254: JP2.2 18.8,22.86 16.38,25.27 16.38,28.45 v18.8,30.86
5V2  (via drill 0.51)
  Top 0.254: R6.2 26.89,30.9 v26.92,30.86 26.96,30.9 R5.2
  Bottom 0.254: JP3.2 26.92,22.86 24.51,25.27 24.51,28.45 v26.92,30.86
5V3  (via drill 0.51)
  Top 0.254: R8.2 35.01,30.9 v35.05,30.86 35.09,30.9 R7.2
  Bottom 0.254: JP4.2 35.05,22.86 32.64,25.27 32.64,28.45 v35.05,30.86
5V4  (via drill 0.51)
  Top 0.254: R10.2 43.14,30.9 v43.18,30.86 43.22,30.9 R9.2
  Bottom 0.254: JP5.2 43.18,22.86 40.77,25.27 40.77,28.45 v43.18,30.86
5V5  (via drill 0.51)
  Top 0.254: R12.2 51.27,30.9 v51.31,30.86 51.35,30.9 R11.2
  Bottom 0.254: JP6.2 51.31,22.86 48.9,25.27 48.9,28.45 v51.31,30.86
5V6  (via drill 0.51)
  Top 0.254: R14.2 59.4,30.9 v59.44,30.86 59.48,30.9 R13.2
  Bottom 0.254: JP7.2 59.44,22.86 57.02,25.27 57.02,28.45 v59.44,30.86
5V7  (via drill 0.51)
  Top 0.254: R16.2 67.53,30.9 v67.56,30.86 67.6,30.9 R15.2
  Bottom 0.254: JP8.2 67.56,22.86 65.15,25.27 65.15,28.45 v67.56,30.86
5V8  (via drill 0.51)
  Top 0.254: R18.2 75.65,30.9 v75.69,30.86 75.73,30.9 R17.2
  Bottom 0.254: JP9.2 75.69,22.86 73.28,25.27 73.28,28.45 v75.69,30.86
5V9  (via drill 0.51)
  Top 0.254: R20.2 83.78,30.9 v83.82,30.86 83.86,30.9 R19.2
  Bottom 0.254: JP10.2 83.82,22.86 81.41,25.27 81.41,28.45 v83.82,30.86
5V10  (via drill 0.51)
  Top 0.254: R22.2 91.91,30.9 v91.95,30.86 91.99,30.9 R21.2
  Bottom 0.254: JP11.2 91.95,22.86 89.53,25.27 89.53,28.45 v91.95,30.86
5V11  (via drill 0.51)
  Top 0.254: R24.2 100.04,30.9 v100.08,30.86 100.11,30.9 R23.2
  Bottom 0.254: JP12.2 100.08,22.86 97.66,25.27 97.66,28.45 v100.08,30.86
5V12  (via drill 0.51)
  Top 0.254: R26.2 10.63,62.65 v10.67,62.61 10.71,62.65 R25.2
  Bottom 0.254: JP13.2 10.67,54.61 8.26,57.02 8.26,60.2 v10.67,62.61
5V13  (via drill 0.51)
  Top 0.254: R28.2 18.76,62.65 v18.8,62.61 18.84,62.65 R27.2
  Bottom 0.254: JP14.2 18.8,54.61 16.38,57.02 16.38,60.2 v18.8,62.61
5V14  (via drill 0.51)
  Top 0.254: R30.2 26.89,62.65 v26.92,62.61 26.96,62.65 R29.2
  Bottom 0.254: JP15.2 26.92,54.61 24.51,57.02 24.51,60.2 v26.92,62.61
5V15  (via drill 0.51)
  Top 0.254: R32.2 35.01,62.65 v35.05,62.61 35.09,62.65 R31.2
  Bottom 0.254: JP16.2 35.05,54.61 32.64,57.02 32.64,60.2 v35.05,62.61
5V16  (via drill 0.51)
  Top 0.254: R34.2 43.14,62.65 v43.18,62.61 43.22,62.65 R33.2
  Bottom 0.254: JP17.2 43.18,54.61 40.77,57.02 40.77,60.2 v43.18,62.61
5V17  (via drill 0.51)
  Top 0.254: R36.2 51.27,62.65 v51.31,62.61 51.35,62.65 R35.2
  Bottom 0.254: JP18.2 51.31,54.61 48.9,57.02 48.9,60.2 v51.31,62.61
5V18  (via drill 0.51)
  Top 0.254: R38.2 59.4,62.65 v59.44,62.61 59.48,62.65 R37.2
  Bottom 0.254: JP19.2 59.44,54.61 57.02,57.02 57.02,60.2 v59.44,62.61
5V19  (via drill 0.51)
  Top 0.254: R40.2 67.53,62.65 v67.56,62.61 67.6,62.65 R39.2
  Bottom 0.254: JP20.2 67.56,54.61 65.15,57.02 65.15,60.2 v67.56,62.61
5V20  (via drill 0.51)
  Top 0.254: R42.2 75.65,62.65 v75.69,62.61 75.73,62.65 R41.2
  Bottom 0.254: JP21.2 75.69,54.61 73.28,57.02 73.28,60.2 v75.69,62.61
5V21  (via drill 0.51)
  Top 0.254: R44.2 83.78,62.65 v83.82,62.61 83.86,62.65 R43.2
  Bottom 0.254: JP22.2 83.82,54.61 81.41,57.02 81.41,60.2 v83.82,62.61
5V22  (via drill 0.51)
  Top 0.254: R46.2 91.91,62.65 v91.95,62.61 91.99,62.65 R45.2
  Bottom 0.254: JP23.2 91.95,54.61 89.53,57.02 89.53,60.2 v91.95,62.61
5V23  (via drill 0.51)
  Top 0.254: R48.2 100.04,62.65 v100.08,62.61 100.11,62.65 R47.2
  Bottom 0.254: JP24.2 100.08,54.61 97.66,57.02 97.66,60.2 v100.08,62.61
5V24  (via drill 0.51)
  Top 0.254: R50.2 10.63,94.4 v10.67,94.36 10.71,94.4 R49.2
  Bottom 0.254: JP25.2 10.67,86.36 8.26,88.77 8.26,91.95 v10.67,94.36
5V25  (via drill 0.51)
  Top 0.254: R52.2 18.76,94.4 v18.8,94.36 18.84,94.4 R51.2
  Bottom 0.254: JP26.2 18.8,86.36 16.38,88.77 16.38,91.95 v18.8,94.36
5V26  (via drill 0.51)
  Top 0.254: R54.2 26.89,94.4 v26.92,94.36 26.96,94.4 R53.2
  Bottom 0.254: JP27.2 26.92,86.36 24.51,88.77 24.51,91.95 v26.92,94.36
5V27  (via drill 0.51)
  Top 0.254: R56.2 35.01,94.4 v35.05,94.36 35.09,94.4 R55.2
  Bottom 0.254: JP28.2 35.05,86.36 32.64,88.77 32.64,91.95 v35.05,94.36
5V28  (via drill 0.51)
  Top 0.254: R58.2 43.14,94.4 v43.18,94.36 43.22,94.4 R57.2
  Bottom 0.254: JP29.2 43.18,86.36 40.77,88.77 40.77,91.95 v43.18,94.36
5V29  (via drill 0.51)
  Top 0.254: R60.2 51.27,94.4 v51.31,94.36 51.35,94.4 R59.2
  Bottom 0.254: JP30.2 51.31,86.36 48.9,88.77 48.9,91.95 v51.31,94.36
5V30  (via drill 0.51)
  Top 0.254: R62.2 59.4,94.4 v59.44,94.36 59.48,94.4 R61.2
  Bottom 0.254: JP31.2 59.44,86.36 57.02,88.77 57.02,91.95 v59.44,94.36
5V31  (via drill 0.51)
  Top 0.254: R64.2 67.53,94.4 v67.56,94.36 67.6,94.4 R63.2
  Bottom 0.254: JP32.2 67.56,86.36 65.15,88.77 65.15,91.95 v67.56,94.36
5V32  (via drill 0.51)
  Top 0.254: R66.2 75.65,94.4 v75.69,94.36 75.73,94.4 R65.2
  Bottom 0.254: JP33.2 75.69,86.36 73.28,88.77 73.28,91.95 v75.69,94.36
5V33  (via drill 0.51)
  Top 0.254: R68.2 83.78,94.4 v83.82,94.36 83.86,94.4 R67.2
  Bottom 0.254: JP34.2 83.82,86.36 81.41,88.77 81.41,91.95 v83.82,94.36
5V34  (via drill 0.51)
  Top 0.254: R70.2 91.91,94.4 v91.95,94.36 91.99,94.4 R69.2
  Bottom 0.254: JP35.2 91.95,86.36 89.53,88.77 89.53,91.95 v91.95,94.36
5V35  (via drill 0.51)
  Top 0.254: R72.2 100.04,94.4 v100.08,94.36 100.11,94.4 R71.2
  Bottom 0.254: JP36.2 100.08,86.36 97.66,88.77 97.66,91.95 v100.08,94.36
GND  (via drill 0.51)
  Top 0.254: U1.2 10.3,36.46 11.3,37.47 13.59,37.47 13.97,37.08 13.97,33.27 v13.46,32.77 12.6,33.63 U1.4
  Bottom 0.254: JP1.1 13.21,24.77 13.84,25.4 13.84,32.38 v13.46,32.77
GND1  (via drill 0.51)
  Top 0.254: U2.2 18.43,36.46 19.43,37.47 21.72,37.47 22.1,37.08 22.1,33.27 v21.59,32.77 20.72,33.63 U2.4
  Bottom 0.254: JP2.1 21.34,24.77 21.97,25.4 21.97,32.38 v21.59,32.77
GND2  (via drill 0.51)
  Top 0.254: U3.2 26.55,36.46 27.56,37.47 29.84,37.47 30.23,37.08 30.23,33.27 v29.72,32.77 28.85,33.63 U3.4
  Bottom 0.254: JP3.1 29.46,24.77 30.1,25.4 30.1,32.38 v29.72,32.77
GND3  (via drill 0.51)
  Top 0.254: U4.2 34.68,36.46 35.69,37.47 37.97,37.47 38.35,37.08 38.35,33.27 v37.85,32.77 36.98,33.63 U4.4
  Bottom 0.254: JP4.1 37.59,24.77 38.23,25.4 38.23,32.38 v37.85,32.77
GND4  (via drill 0.51)
  Top 0.254: U5.2 42.81,36.46 43.81,37.47 46.1,37.47 46.48,37.08 46.48,33.27 v45.97,32.77 45.11,33.63 U5.4
  Bottom 0.254: JP5.1 45.72,24.77 46.35,25.4 46.35,32.38 v45.97,32.77
GND5  (via drill 0.51)
  Top 0.254: U6.2 50.94,36.46 51.94,37.47 54.23,37.47 54.61,37.08 54.61,33.27 v54.1,32.77 53.23,33.63 U6.4
  Bottom 0.254: JP6.1 53.85,24.77 54.48,25.4 54.48,32.38 v54.1,32.77
GND6  (via drill 0.51)
  Top 0.254: U7.2 59.07,36.46 60.07,37.47 62.36,37.47 62.74,37.08 62.74,33.27 v62.23,32.77 61.36,33.63 U7.4
  Bottom 0.254: JP7.1 61.98,24.77 62.61,25.4 62.61,32.38 v62.23,32.77
GND7  (via drill 0.51)
  Top 0.254: U8.2 67.19,36.46 68.2,37.47 70.48,37.47 70.87,37.08 70.87,33.27 v70.36,32.77 69.49,33.63 U8.4
  Bottom 0.254: JP8.1 70.1,24.77 70.74,25.4 70.74,32.38 v70.36,32.77
GND8  (via drill 0.51)
  Top 0.254: U9.2 75.32,36.46 76.33,37.47 78.61,37.47 78.99,37.08 78.99,33.27 v78.49,32.77 77.62,33.63 U9.4
  Bottom 0.254: JP9.1 78.23,24.77 78.87,25.4 78.87,32.38 v78.49,32.77
GND9  (via drill 0.51)
  Top 0.254: U10.2 83.45,36.46 84.45,37.47 86.74,37.47 87.12,37.08 87.12,33.27 v86.61,32.77 85.75,33.63 U10.4
  Bottom 0.254: JP10.1 86.36,24.77 87,25.4 87,32.38 v86.61,32.77
GND10  (via drill 0.51)
  Top 0.254: U11.2 91.58,36.46 92.58,37.47 94.87,37.47 95.25,37.08 95.25,33.27 v94.74,32.77 93.88,33.63 U11.4
  Bottom 0.254: JP11.1 94.49,24.77 95.12,25.4 95.12,32.38 v94.74,32.77
GND11  (via drill 0.51)
  Top 0.254: U12.2 99.71,36.46 100.71,37.47 103,37.47 103.38,37.08 103.38,33.27 v102.87,32.77 102,33.63 U12.4
  Bottom 0.254: JP12.1 102.62,24.77 103.25,25.4 103.25,32.38 v102.87,32.77
GND12  (via drill 0.51)
  Top 0.254: U13.2 10.3,68.21 11.3,69.22 13.59,69.22 13.97,68.83 13.97,65.02 v13.46,64.52 12.6,65.38 U13.4
  Bottom 0.254: JP13.1 13.21,56.52 13.84,57.15 13.84,64.14 v13.46,64.52
GND13  (via drill 0.51)
  Top 0.254: U14.2 18.43,68.21 19.43,69.22 21.72,69.22 22.1,68.83 22.1,65.02 v21.59,64.52 20.72,65.38 U14.4
  Bottom 0.254: JP14.1 21.34,56.52 21.97,57.15 21.97,64.14 v21.59,64.52
GND14  (via drill 0.51)
  Top 0.254: U15.2 26.55,68.21 27.56,69.22 29.84,69.22 30.23,68.83 30.23,65.02 v29.72,64.52 28.85,65.38 U15.4
  Bottom 0.254: JP15.1 29.46,56.52 30.1,57.15 30.1,64.14 v29.72,64.52
GND15  (via drill 0.51)
  Top 0.254: U16.2 34.68,68.21 35.69,69.22 37.97,69.22 38.35,68.83 38.35,65.02 v37.85,64.52 36.98,65.38 U16.4
  Bottom 0.254: JP16.1 37.59,56.52 38.23,57.15 38.23,64.14 v37.85,64.52
GND16  (via drill 0.51)
  Top 0.254: U17.2 42.81,68.21 43.81,69.22 46.1,69.22 46.48,68.83 46.48,65.02 v45.97,64.52 45.11,65.38 U17.4
  Bottom 0.254: JP17.1 45.72,56.52 46.35,57.15 46.35,64.14 v45.97,64.52
GND17  (via drill 0.51)
  Top 0.254: U18.2 50.94,68.21 51.94,69.22 54.23,69.22 54.61,68.83 54.61,65.02 v54.1,64.52 53.23,65.38 U18.4
  Bottom 0.254: JP18.1 53.85,56.52 54.48,57.15 54.48,64.14 v54.1,64.52
GND18  (via drill 0.51)
  Top 0.254: U19.2 59.07,68.21 60.07,69.22 62.36,69.22 62.74,68.83 62.74,65.02 v62.23,64.52 61.36,65.38 U19.4
  Bottom 0.254: JP19.1 61.98,56.52 62.61,57.15 62.61,64.14 v62.23,64.52
GND19  (via drill 0.51)
  Top 0.254: U20.2 67.19,68.21 68.2,69.22 70.48,69.22 70.87,68.83 70.87,65.02 v70.36,64.52 69.49,65.38 U20.4
  Bottom 0.254: JP20.1 70.1,56.52 70.74,57.15 70.74,64.14 v70.36,64.52
GND20  (via drill 0.51)
  Top 0.254: U21.2 75.32,68.21 76.33,69.22 78.61,69.22 78.99,68.83 78.99,65.02 v78.49,64.52 77.62,65.38 U21.4
  Bottom 0.254: JP21.1 78.23,56.52 78.87,57.15 78.87,64.14 v78.49,64.52
GND21  (via drill 0.51)
  Top 0.254: U22.2 83.45,68.21 84.45,69.22 86.74,69.22 87.12,68.83 87.12,65.02 v86.61,64.52 85.75,65.38 U22.4
  Bottom 0.254: JP22.1 86.36,56.52 87,57.15 87,64.14 v86.61,64.52
GND22  (via drill 0.51)
  Top 0.254: U23.2 91.58,68.21 92.58,69.22 94.87,69.22 95.25,68.83 95.25,65.02 v94.74,64.52 93.88,65.38 U23.4
  Bottom 0.254: JP23.1 94.49,56.52 95.12,57.15 95.12,64.14 v94.74,64.52
GND23  (via drill 0.51)
  Top 0.254: U24.2 99.71,68.21 100.71,69.22 103,69.22 103.38,68.83 103.38,65.02 v102.87,64.52 102,65.38 U24.4
  Bottom 0.254: JP24.1 102.62,56.52 103.25,57.15 103.25,64.14 v102.87,64.52
GND24  (via drill 0.51)
  Top 0.254: U25.2 10.3,99.96 11.3,100.97 13.59,100.97 13.97,100.58 13.97,96.77 v13.46,96.27 12.6,97.13 U25.4
  Bottom 0.254: JP25.1 13.21,88.27 13.84,88.9 13.84,95.89 v13.46,96.27
GND25  (via drill 0.51)
  Top 0.254: U26.2 18.43,99.96 19.43,100.97 21.72,100.97 22.1,100.58 22.1,96.77 v21.59,96.27 20.72,97.13 U26.4
  Bottom 0.254: JP26.1 21.34,88.27 21.97,88.9 21.97,95.89 v21.59,96.27
GND26  (via drill 0.51)
  Top 0.254: U27.2 26.55,99.96 27.56,100.97 29.84,100.97 30.23,100.58 30.23,96.77 v29.72,96.27 28.85,97.13 U27.4
  Bottom 0.254: JP27.1 29.46,88.27 30.1,88.9 30.1,95.89 v29.72,96.27
GND27  (via drill 0.51)
  Top 0.254: U28.2 34.68,99.96 35.69,100.97 37.97,100.97 38.35,100.58 38.35,96.77 v37.85,96.27 36.98,97.13 U28.4
  Bottom 0.254: JP28.1 37.59,88.27 38.23,88.9 38.23,95.89 v37.85,96.27
GND28  (via drill 0.51)
  Top 0.254: U29.2 42.81,99.96 43.81,100.97 46.1,100.97 46.48,100.58 46.48,96.77 v45.97,96.27 45.11,97.13 U29.4
  Bottom 0.254: JP29.1 45.72,88.27 46.35,88.9 46.35,95.89 v45.97,96.27
GND29  (via drill 0.51)
  Top 0.254: U30.2 50.94,99.96 51.94,100.97 54.23,100.97 54.61,100.58 54.61,96.77 v54.1,96.27 53.23,97.13 U30.4
  Bottom 0.254: JP30.1 53.85,88.27 54.48,88.9 54.48,95.89 v54.1,96.27
GND30  (via drill 0.51)
  Top 0.254: U31.2 59.07,99.96 60.07,100.97 62.36,100.97 62.74,100.58 62.74,96.77 v62.23,96.27 61.36,97.13 U31.4
  Bottom 0.254: JP31.1 61.98,88.27 62.61,88.9 62.61,95.89 v62.23,96.27
GND31  (via drill 0.51)
  Top 0.254: U32.2 67.19,99.96 68.2,100.97 70.48,100.97 70.87,100.58 70.87,96.77 v70.36,96.27 69.49,97.13 U32.4
  Bottom 0.254: JP32.1 70.1,88.27 70.74,88.9 70.74,95.89 v70.36,96.27
GND32  (via drill 0.51)
  Top 0.254: U33.2 75.32,99.96 76.33,100.97 78.61,100.97 78.99,100.58 78.99,96.77 v78.49,96.27 77.62,97.13 U33.4
  Bottom 0.254: JP33.1 78.23,88.27 78.87,88.9 78.87,95.89 v78.49,96.27
GND33  (via drill 0.51)
  Top 0.254: U34.2 83.45,99.96 84.45,100.97 86.74,100.97 87.12,100.58 87.12,96.77 v86.61,96.27 85.75,97.13 U34.4
  Bottom 0.254: JP34.1 86.36,88.27 87,88.9 87,95.89 v86.61,96.27
GND34  (via drill 0.51)
  Top 0.254: U35.2 91.58,99.96 92.58,100.97 94.87,100.97 95.25,100.58 95.25,96.77 v94.74,96.27 93.88,97.13 U35.4
  Bottom 0.254: JP35.1 94.49,88.27 95.12,88.9 95.12,95.89 v94.74,96.27
GND35  (via drill 0.51)
  Top 0.254: U36.2 99.71,99.96 100.71,100.97 103,100.97 103.38,100.58 103.38,96.77 v102.87,96.27 102,97.13 U36.4
  Bottom 0.254: JP36.1 102.62,88.27 103.25,88.9 103.25,95.89 v102.87,96.27
N$1
  Top 0.254: U1.1 11.57,36.46 10.67,35.56 10.67,33.02 11.09,32.6 R1.1
N$2  (via drill 0.51)
  Top 0.254: v7.75,31.75 8.6,32.6 R2.1 9.4,33.15 8.74,33.8 U1.3
  Bottom 0.254: JP1.3 8.13,22.99 7.75,23.37 v7.75,31.75
N$3
  Top 0.254: U2.1 19.7,36.46 18.8,35.56 18.8,33.02 19.22,32.6 R3.1
N$4  (via drill 0.51)
  Top 0.254: v15.88,31.75 16.73,32.6 R4.1 17.53,33.15 16.87,33.8 U2.3
  Bottom 0.254: JP2.3 16.26,22.99 15.88,23.37 v15.88,31.75
N$5
  Top 0.254: U3.1 27.82,36.46 26.92,35.56 26.92,33.02 27.34,32.6 R5.1
N$6  (via drill 0.51)
  Top 0.254: v24,31.75 24.85,32.6 R6.1 25.65,33.15 25,33.8 U3.3
  Bottom 0.254: JP3.3 24.38,22.99 24,23.37 v24,31.75
N$7
  Top 0.254: U4.1 35.95,36.46 35.05,35.56 35.05,33.02 35.47,32.6 R7.1
N$8  (via drill 0.51)
  Top 0.254: v32.13,31.75 32.98,32.6 R8.1 33.78,33.15 33.12,33.8 U4.3
  Bottom 0.254: JP4.3 32.51,22.99 32.13,23.37 v32.13,31.75
N$9
  Top 0.254: U5.1 44.08,36.46 43.18,35.56 43.18,33.02 43.6,32.6 R9.1
N$10  (via drill 0.51)
  Top 0.254: v40.26,31.75 41.11,32.6 R10.1 41.91,33.15 41.25,33.8 U5.3
  Bottom 0.254: JP5.3 40.64,22.99 40.26,23.37 v40.26,31.75
N$11
  Top 0.254: U6.1 52.21,36.46 51.31,35.56 51.31,33.02 51.73,32.6 R11.1
N$12  (via drill 0.51)
  Top 0.254: v48.39,31.75 49.24,32.6 R12.1 50.04,33.15 49.38,33.8 U6.3
  Bottom 0.254: JP6.3 48.77,22.99 48.39,23.37 v48.39,31.75
N$13
  Top 0.254: U7.1 60.34,36.46 59.44,35.56 59.44,33.02 59.86,32.6 R13.1
N$14  (via drill 0.51)
  Top 0.254: v56.52,31.75 57.37,32.6 R14.1 58.17,33.15 57.51,33.8 U7.3
  Bottom 0.254: JP7.3 56.9,22.99 56.52,23.37 v56.52,31.75
N$15
  Top 0.254: U8.1 68.46,36.46 67.56,35.56 67.56,33.02 67.98,32.6 R15.1
N$16  (via drill 0.51)
  Top 0.254: v64.64,31.75 65.49,32.6 R16.1 66.29,33.15 65.64,33.8 U8.3
  Bottom 0.254: JP8.3 65.02,22.99 64.64,23.37 v64.64,31.75
N$17
  Top 0.254: U9.1 76.59,36.46 75.69,35.56 75.69,33.02 76.11,32.6 R17.1
N$18  (via drill 0.51)
  Top 0.254: v72.77,31.75 73.62,32.6 R18.1 74.42,33.15 73.77,33.8 U9.3
  Bottom 0.254: JP9.3 73.15,22.99 72.77,23.37 v72.77,31.75
N$19
  Top 0.254: U10.1 84.72,36.46 83.82,35.56 83.82,33.02 84.24,32.6 R19.1
N$20  (via drill 0.51)
  Top 0.254: v80.9,31.75 81.75,32.6 R20.1 82.55,33.15 81.89,33.8 U10.3
  Bottom 0.254: JP10.3 81.28,22.99 80.9,23.37 v80.9,31.75
N$21
  Top 0.254: U11.1 92.85,36.46 91.95,35.56 91.95,33.02 92.37,32.6 R21.1
N$22  (via drill 0.51)
  Top 0.254: v89.03,31.75 89.88,32.6 R22.1 90.68,33.15 90.02,33.8 U11.3
  Bottom 0.254: JP11.3 89.41,22.99 89.03,23.37 v89.03,31.75
N$23
  Top 0.254: U12.1 100.98,36.46 100.08,35.56 100.08,33.02 100.5,32.6 R23.1
N$24  (via drill 0.51)
  Top 0.254: v97.16,31.75 98,32.6 R24.1 98.81,33.15 98.15,33.8 U12.3
  Bottom 0.254: JP12.3 97.54,22.99 97.16,23.37 v97.16,31.75
N$25
  Top 0.254: U13.1 11.57,68.21 10.67,67.31 10.67,64.77 11.09,64.35 R25.1
N$26  (via drill 0.51)
  Top 0.254: v7.75,63.5 8.6,64.35 R26.1 9.4,64.9 8.74,65.55 U13.3
  Bottom 0.254: JP13.3 8.13,54.74 7.75,55.12 v7.75,63.5
N$27
  Top 0.254: U14.1 19.7,68.21 18.8,67.31 18.8,64.77 19.22,64.35 R27.1
N$28  (via drill 0.51)
  Top 0.254: v15.88,63.5 16.73,64.35 R28.1 17.53,64.9 16.87,65.55 U14.3
  Bottom 0.254: JP14.3 16.26,54.74 15.88,55.12 v15.88,63.5
N$29
  Top 0.254: U15.1 27.82,68.21 26.92,67.31 26.92,64.77 27.34,64.35 R29.1
N$30  (via drill 0.51)
  Top 0.254: v24,63.5 24.85,64.35 R30.1 25.65,64.9 25,65.55 U15.3
  Bottom 0.254: JP15.3 24.38,54.74 24,55.12 v24,63.5
N$31
  Top 0.254: U16.1 35.95,68.21 35.05,67.31 35.05,64.77 35.47,64.35 R31.1
N$32  (via drill 0.51)
  Top 0.254: v32.13,63.5 32.98,64.35 R32.1 33.78,64.9 33.12,65.55 U16.3
  Bottom 0.254: JP16.3 32.51,54.74 32.13,55.12 v32.13,63.5
N$33
  Top 0.254: U17.1 44.08,68.21 43.18,67.31 43.18,64.77 43.6,64.35 R33.1
N$34  (via drill 0.51)
  Top 0.254: v40.26,63.5 41.11,64.35 R34.1 41.91,64.9 41.25,65.55 U17.3
  Bottom 0.254: JP17.3 40.64,54.74 40.26,55.12 v40.26,63.5
N$35
  Top 0.254: U18.1 52.21,68.21 51.31,67.31 51.31,64.77 51.73,64.35 R35.1
N$36  (via drill 0.51)
  Top 0.254: v48.39,63.5 49.24,64.35 R36.1 50.04,64.9 49.38,65.55 U18.3
  Bottom 0.254: JP18.3 48.77,54.74 48.39,55.12 v48.39,63.5
N$37
  Top 0.254: U19.1 60.34,68.21 59.44,67.31 59.44,64.77 59.86,64.35 R37.1
N$38  (via drill 0.51)
  Top 0.254: v56.52,63.5 57.37,64.35 R38.1 58.17,64.9 57.51,65.55 U19.3
  Bottom 0.254: JP19.3 56.9,54.74 56.52,55.12 v56.52,63.5
N$39
  Top 0.254: U20.1 68.46,68.21 67.56,67.31 67.56,64.77 67.98,64.35 R39.1
N$40  (via drill 0.51)
  Top 0.254: v64.64,63.5 65.49,64.35 R40.1 66.29,64.9 65.64,65.55 U20.3
  Bottom 0.254: JP20.3 65.02,54.74 64.64,55.12 v64.64,63.5
N$41
  Top 0.254: U21.1 76.59,68.21 75.69,67.31 75.69,64.77 76.11,64.35 R41.1
N$42  (via drill 0.51)
  Top 0.254: v72.77,63.5 73.62,64.35 R42.1 74.42,64.9 73.77,65.55 U21.3
  Bottom 0.254: JP21.3 73.15,54.74 72.77,55.12 v72.77,63.5
N$43
  Top 0.254: U22.1 84.72,68.21 83.82,67.31 83.82,64.77 84.24,64.35 R43.1
N$44  (via drill 0.51)
  Top 0.254: v80.9,63.5 81.75,64.35 R44.1 82.55,64.9 81.89,65.55 U22.3
  Bottom 0.254: JP22.3 81.28,54.74 80.9,55.12 v80.9,63.5
N$45
  Top 0.254: U23.1 92.85,68.21 91.95,67.31 91.95,64.77 92.37,64.35 R45.1
N$46  (via drill 0.51)
  Top 0.254: v89.03,63.5 89.88,64.35 R46.1 90.68,64.9 90.02,65.55 U23.3
  Bottom 0.254: JP23.3 89.41,54.74 89.03,55.12 v89.03,63.5
N$47
  Top 0.254: U24.1 100.98,68.21 100.08,67.31 100.08,64.77 100.5,64.35 R47.1
N$48  (via drill 0.51)
  Top 0.254: v97.16,63.5 98,64.35 R48.1 98.81,64.9 98.15,65.55 U24.3
  Bottom 0.254: JP24.3 97.54,54.74 97.16,55.12 v97.16,63.5
N$49
  Top 0.254: U25.1 11.57,99.96 10.67,99.06 10.67,96.52 11.09,96.1 R49.1
N$50  (via drill 0.51)
  Top 0.254: v7.75,95.25 8.6,96.1 R50.1 9.4,96.65 8.74,97.3 U25.3
  Bottom 0.254: JP25.3 8.13,86.49 7.75,86.87 v7.75,95.25
N$51
  Top 0.254: U26.1 19.7,99.96 18.8,99.06 18.8,96.52 19.22,96.1 R51.1
N$52  (via drill 0.51)
  Top 0.254: v15.88,95.25 16.73,96.1 R52.1 17.53,96.65 16.87,97.3 U26.3
  Bottom 0.254: JP26.3 16.26,86.49 15.88,86.87 v15.88,95.25
N$53
  Top 0.254: U27.1 27.82,99.96 26.92,99.06 26.92,96.52 27.34,96.1 R53.1
N$54  (via drill 0.51)
  Top 0.254: v24,95.25 24.85,96.1 R54.1 25.65,96.65 25,97.3 U27.3
  Bottom 0.254: JP27.3 24.38,86.49 24,86.87 v24,95.25
N$55
  Top 0.254: U28.1 35.95,99.96 35.05,99.06 35.05,96.52 35.47,96.1 R55.1
N$56  (via drill 0.51)
  Top 0.254: v32.13,95.25 32.98,96.1 R56.1 33.78,96.65 33.12,97.3 U28.3
  Bottom 0.254: JP28.3 32.51,86.49 32.13,86.87 v32.13,95.25
N$57
  Top 0.254: U29.1 44.08,99.96 43.18,99.06 43.18,96.52 43.6,96.1 R57.1
N$58  (via drill 0.51)
  Top 0.254: v40.26,95.25 41.11,96.1 R58.1 41.91,96.65 41.25,97.3 U29.3
  Bottom 0.254: JP29.3 40.64,86.49 40.26,86.87 v40.26,95.25
N$59
  Top 0.254: U30.1 52.21,99.96 51.31,99.06 51.31,96.52 51.73,96.1 R59.1
N$60  (via drill 0.51)
  Top 0.254: v48.39,95.25 49.24,96.1 R60.1 50.04,96.65 49.38,97.3 U30.3
  Bottom 0.254: JP30.3 48.77,86.49 48.39,86.87 v48.39,95.25
N$61
  Top 0.254: U31.1 60.34,99.96 59.44,99.06 59.44,96.52 59.86,96.1 R61.1
N$62  (via drill 0.51)
  Top 0.254: v56.52,95.25 57.37,96.1 R62.1 58.17,96.65 57.51,97.3 U31.3
  Bottom 0.254: JP31.3 56.9,86.49 56.52,86.87 v56.52,95.25
N$63
  Top 0.254: U32.1 68.46,99.96 67.56,99.06 67.56,96.52 67.98,96.1 R63.1
N$64  (via drill 0.51)
  Top 0.254: v64.64,95.25 65.49,96.1 R64.1 66.29,96.65 65.64,97.3 U32.3
  Bottom 0.254: JP32.3 65.02,86.49 64.64,86.87 v64.64,95.25
N$65
  Top 0.254: U33.1 76.59,99.96 75.69,99.06 75.69,96.52 76.11,96.1 R65.1
N$66  (via drill 0.51)
  Top 0.254: v72.77,95.25 73.62,96.1 R66.1 74.42,96.65 73.77,97.3 U33.3
  Bottom 0.254: JP33.3 73.15,86.49 72.77,86.87 v72.77,95.25
N$67
  Top 0.254: U34.1 84.72,99.96 83.82,99.06 83.82,96.52 84.24,96.1 R67.1
N$68  (via drill 0.51)
  Top 0.254: v80.9,95.25 81.75,96.1 R68.1 82.55,96.65 81.89,97.3 U34.3
  Bottom 0.254: JP34.3 81.28,86.49 80.9,86.87 v80.9,95.25
N$69
  Top 0.254: U35.1 92.85,99.96 91.95,99.06 91.95,96.52 92.37,96.1 R69.1
N$70  (via drill 0.51)
  Top 0.254: v89.03,95.25 89.88,96.1 R70.1 90.68,96.65 90.02,97.3 U35.3
  Bottom 0.254: JP35.3 89.41,86.49 89.03,86.87 v89.03,95.25
N$71
  Top 0.254: U36.1 100.98,99.96 100.08,99.06 100.08,96.52 100.5,96.1 R71.1
N$72  (via drill 0.51)
  Top 0.254: v97.16,95.25 98,96.1 R72.1 98.81,96.65 98.15,97.3 U36.3
  Bottom 0.254: JP36.3 97.54,86.49 97.16,86.87 v97.16,95.25

## Text on the board
Bottom: v11 | v11 | v11 | v11 | v11 | v11 | v11 | v11 | v11 | v11 | v11 | v11 | v11 | v11 | v11 | v11 | v11 | v11 | v11 | v11 | v11 | v11 | v11 | v11 | v11 | v11 | v11 | v11 | v11 | v11 | v11 | v11 | v11 | v11 | v11 | v11
tPlace: QRE1113 / Analog / Line / Sensor | QRE1113 / Analog / Line / Sensor | QRE1113 / Analog / Line / Sensor | QRE1113 / Analog / Line / Sensor | QRE1113 / Analog / Line / Sensor | QRE1113 / Analog / Line / Sensor | QRE1113 / Analog / Line / Sensor | QRE1113 / Analog / Line / Sensor | QRE1113 / Analog / Line / Sensor | QRE1113 / Analog / Line / Sensor | QRE1113 / Analog / Line / Sensor | QRE1113 / Analog / Line / Sensor | OUT | VCC | GND | OUT | VCC | GND | OUT | VCC | GND | OUT | VCC | GND | OUT | VCC | GND | OUT | VCC | GND | OUT | VCC | GND | OUT | VCC | GND | OUT | VCC | GND | OUT | VCC | GND | OUT | VCC | GND | OUT | VCC | GND | QRE1113 / Analog / Line / Sensor | QRE1113 / Analog / Line / Sensor | QRE1113 / Analog / Line / Sensor | QRE1113 / Analog / Line / Sensor | QRE1113 / Analog / Line / Sensor | QRE1113 / Analog / Line / Sensor | QRE1113 / Analog / Line / Sensor | QRE1113 / Analog / Line / Sensor | QRE1113 / Analog / Line / Sensor | QRE1113 / Analog / Line / Sensor | QRE1113 / Analog / Line / Sensor | QRE1113 / Analog / Line / Sensor | OUT | VCC | GND | OUT | VCC | GND | OUT | VCC | GND | OUT | VCC | GND | OUT | VCC | GND | OUT | VCC | GND | OUT | VCC | GND | OUT | VCC | GND | OUT | VCC | GND | OUT | VCC | GND | OUT | VCC | GND | OUT | VCC | GND | QRE1113 / Analog / Line / Sensor | QRE1113 / Analog / Line / Sensor | QRE1113 / Analog / Line / Sensor | QRE1113 / Analog / Line / Sensor | QRE1113 / Analog / Line / Sensor | QRE1113 / Analog / Line / Sensor | QRE1113 / Analog / Line / Sensor | QRE1113 / Analog / Line / Sensor | QRE1113 / Analog / Line / Sensor | QRE1113 / Analog / Line / Sensor | QRE1113 / Analog / Line / Sensor | QRE1113 / Analog / Line / Sensor | OUT | VCC | GND | OUT | VCC | GND | OUT | VCC | GND | OUT | VCC | GND | OUT | VCC | GND | OUT | VCC | GND | OUT | VCC | GND | OUT | VCC | GND | OUT | VCC | GND | OUT | VCC | GND | OUT | VCC | GND | OUT | VCC | GND
bPlace: OUT | VCC | GND | OUT | VCC | GND | OUT | VCC | GND | OUT | VCC | GND | OUT | VCC | GND | OUT | VCC | GND | OUT | VCC | GND | OUT | VCC | GND | OUT | VCC | GND | OUT | VCC | GND | OUT | VCC | GND | OUT | VCC | GND | OUT | VCC | GND | OUT | VCC | GND | OUT | VCC | GND | OUT | VCC | GND | OUT | VCC | GND | OUT | VCC | GND | OUT | VCC | GND | OUT | VCC | GND | OUT | VCC | GND | OUT | VCC | GND | OUT | VCC | GND | OUT | VCC | GND | OUT | VCC | GND | OUT | VCC | GND | OUT | VCC | GND | OUT | VCC | GND | OUT | VCC | GND | OUT | VCC | GND | OUT | VCC | GND | OUT | VCC | GND | OUT | VCC | GND | OUT | VCC | GND | OUT | VCC | GND | OUT | VCC | GND